# Altium PCB stm.PcbDoc
Units mm, origin at the board's own origin, x right, y up, seen from the top; angles counter-clockwise.
Board outline 39 x 36.5 mm, 4 copper layers (L1 (Signal), L2 (GND), L3 (GND), L4 (Signal)), stack 1.57 mm thick; 35 components, 27 nets, 174 pads, 59 vias.
Unrouted connection lines stored in the file: 8.
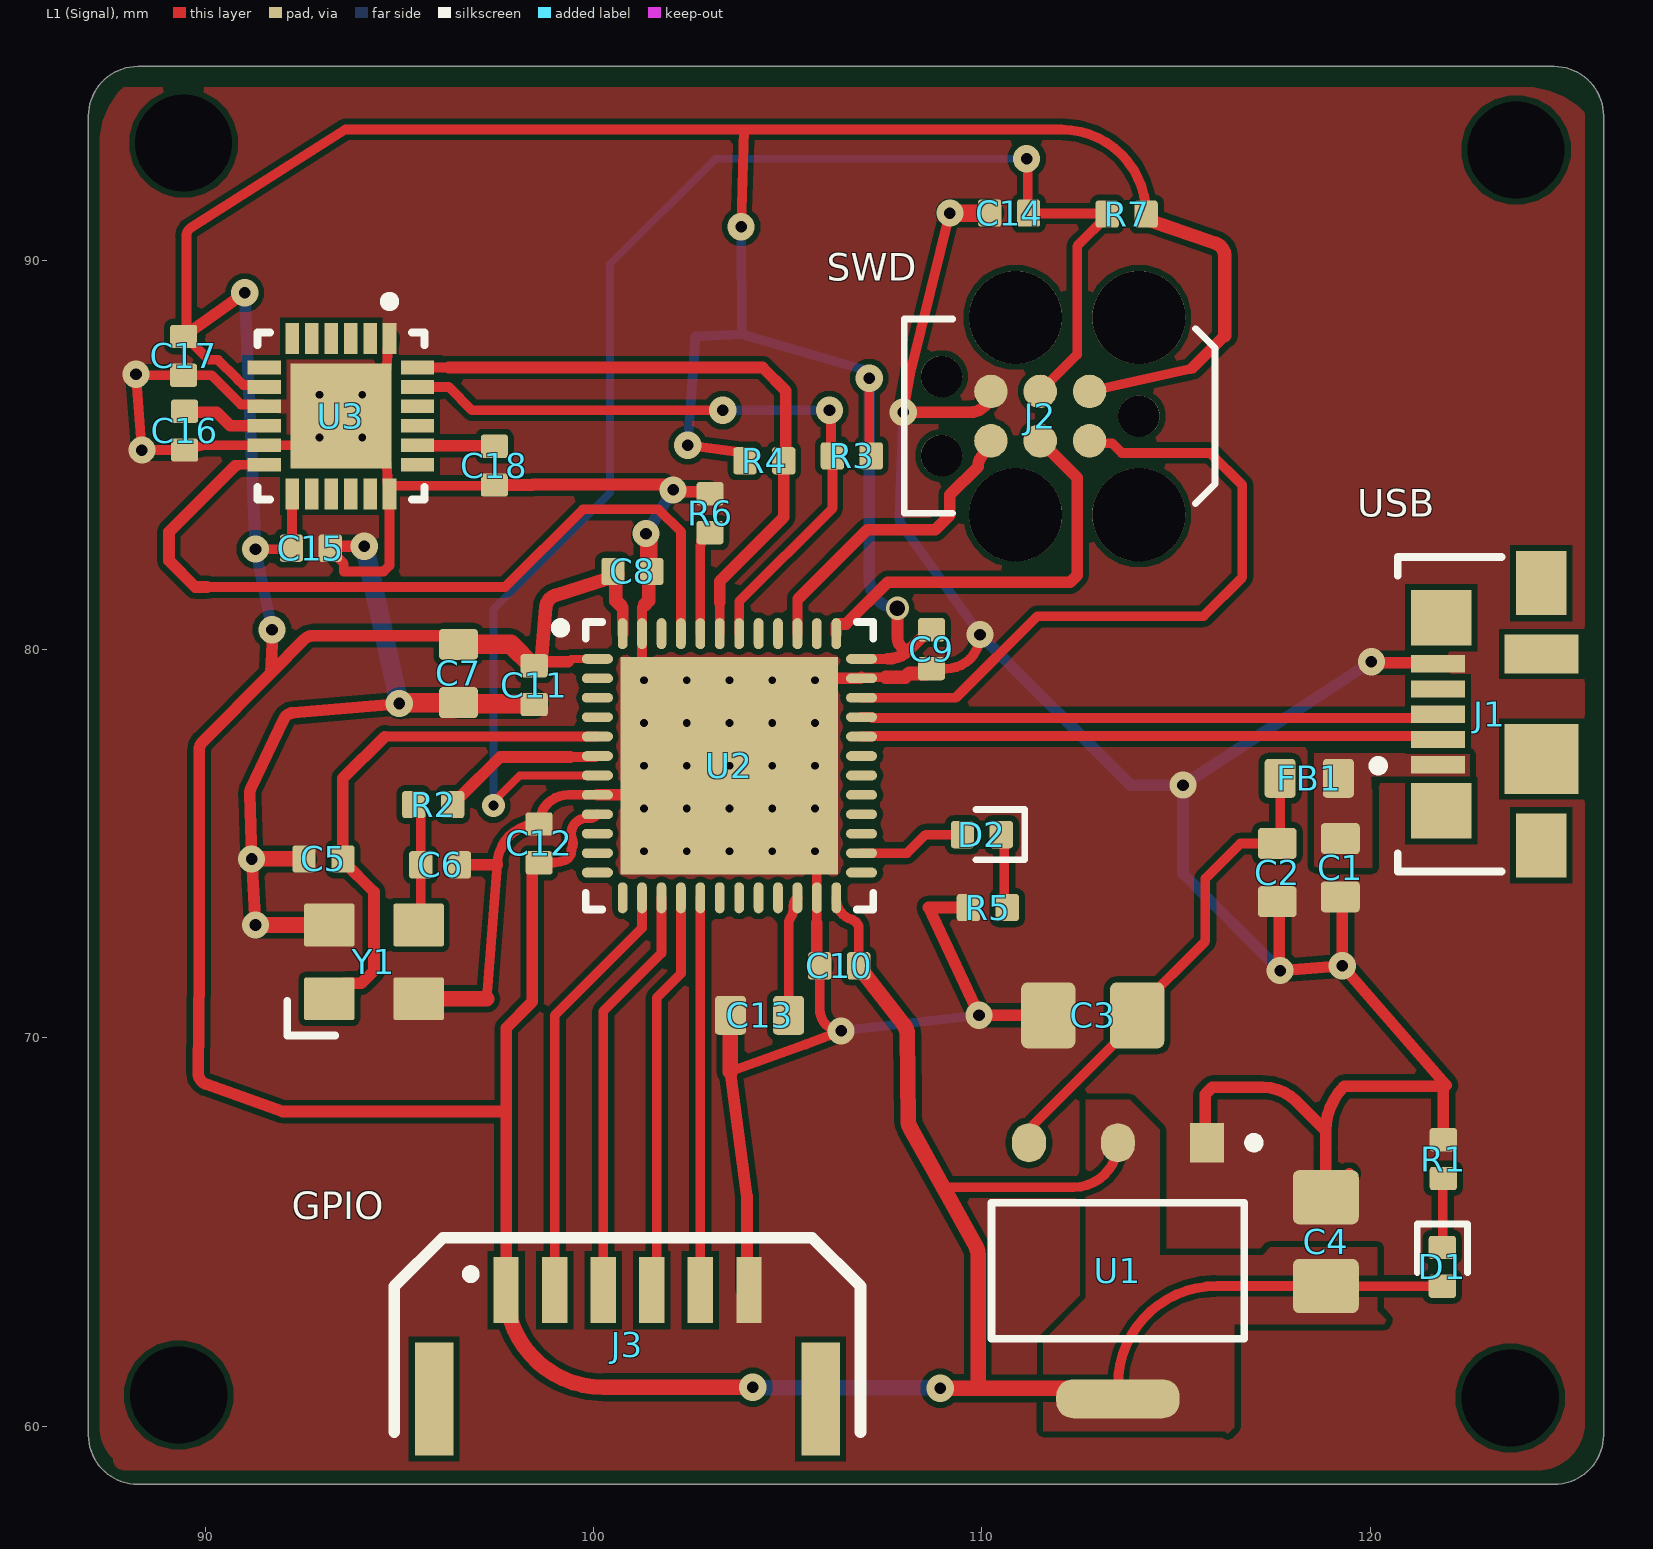
[diagram p0: L1 (Signal) view]
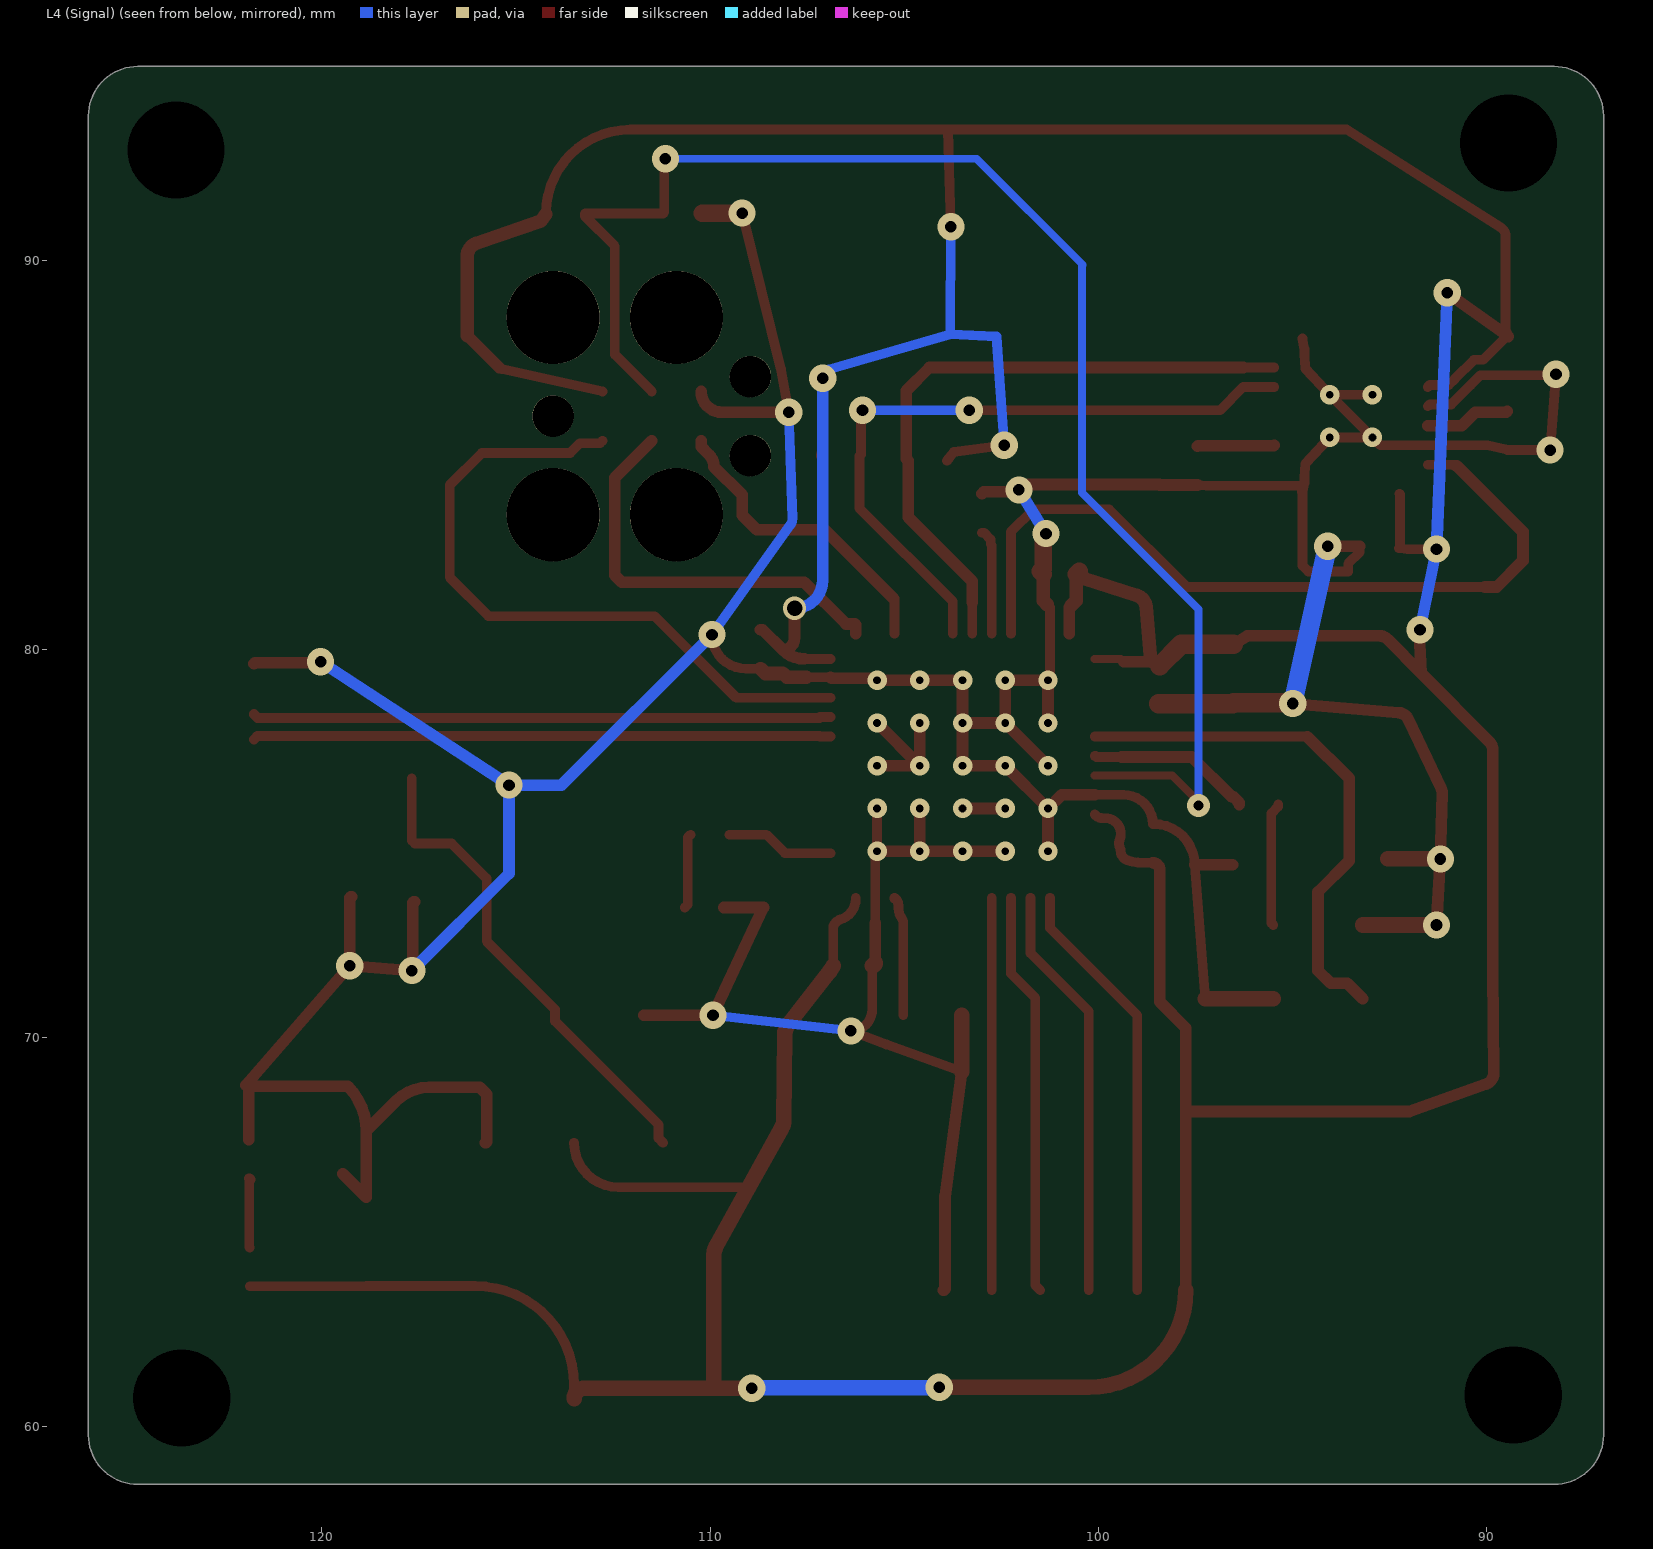
[diagram p1: L4 (Signal) view, seen from below]
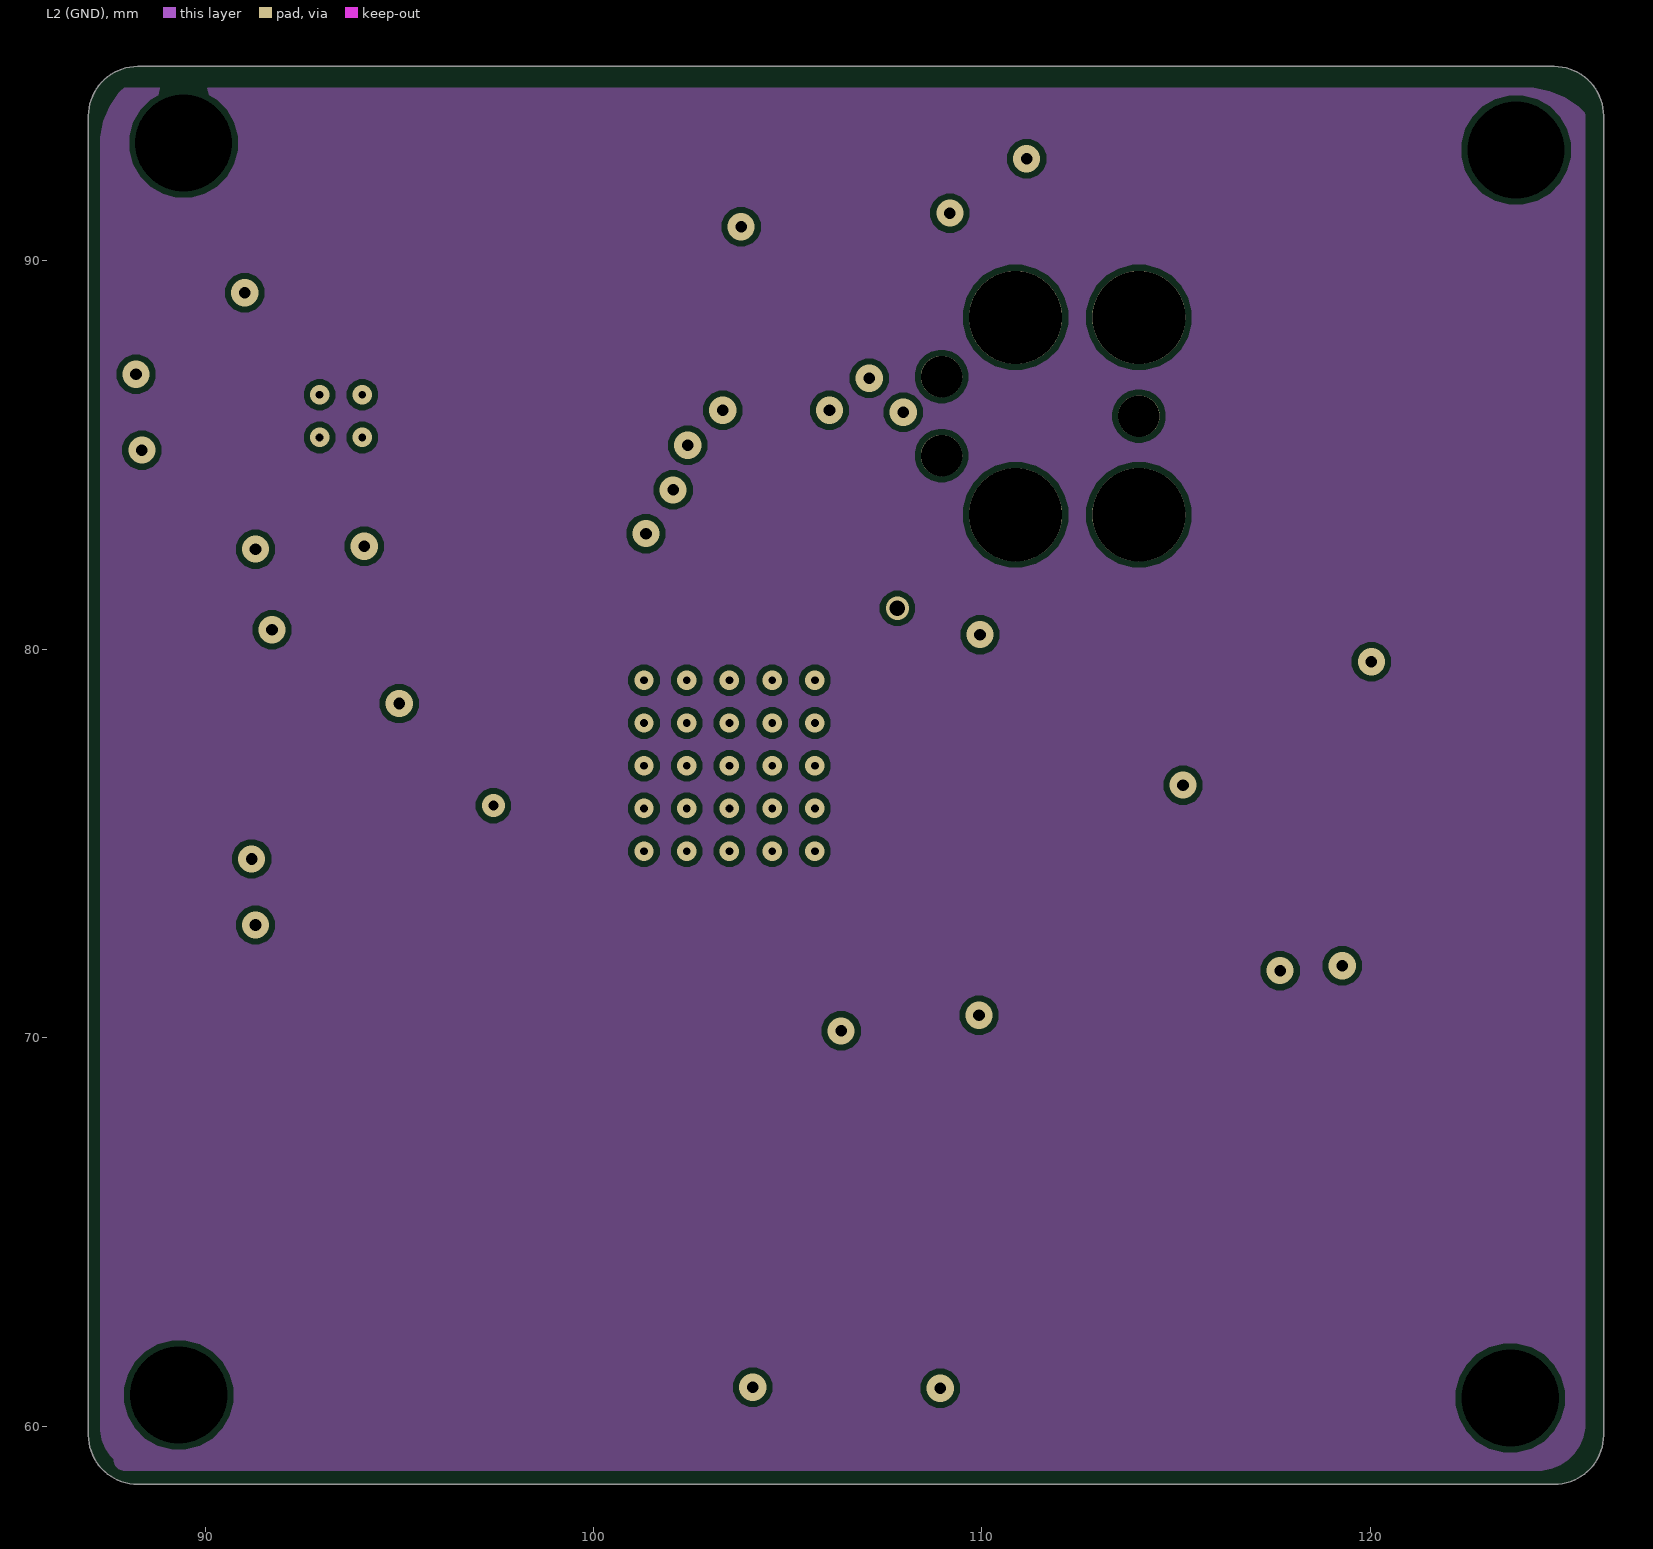
[diagram p2: L2 (GND)]
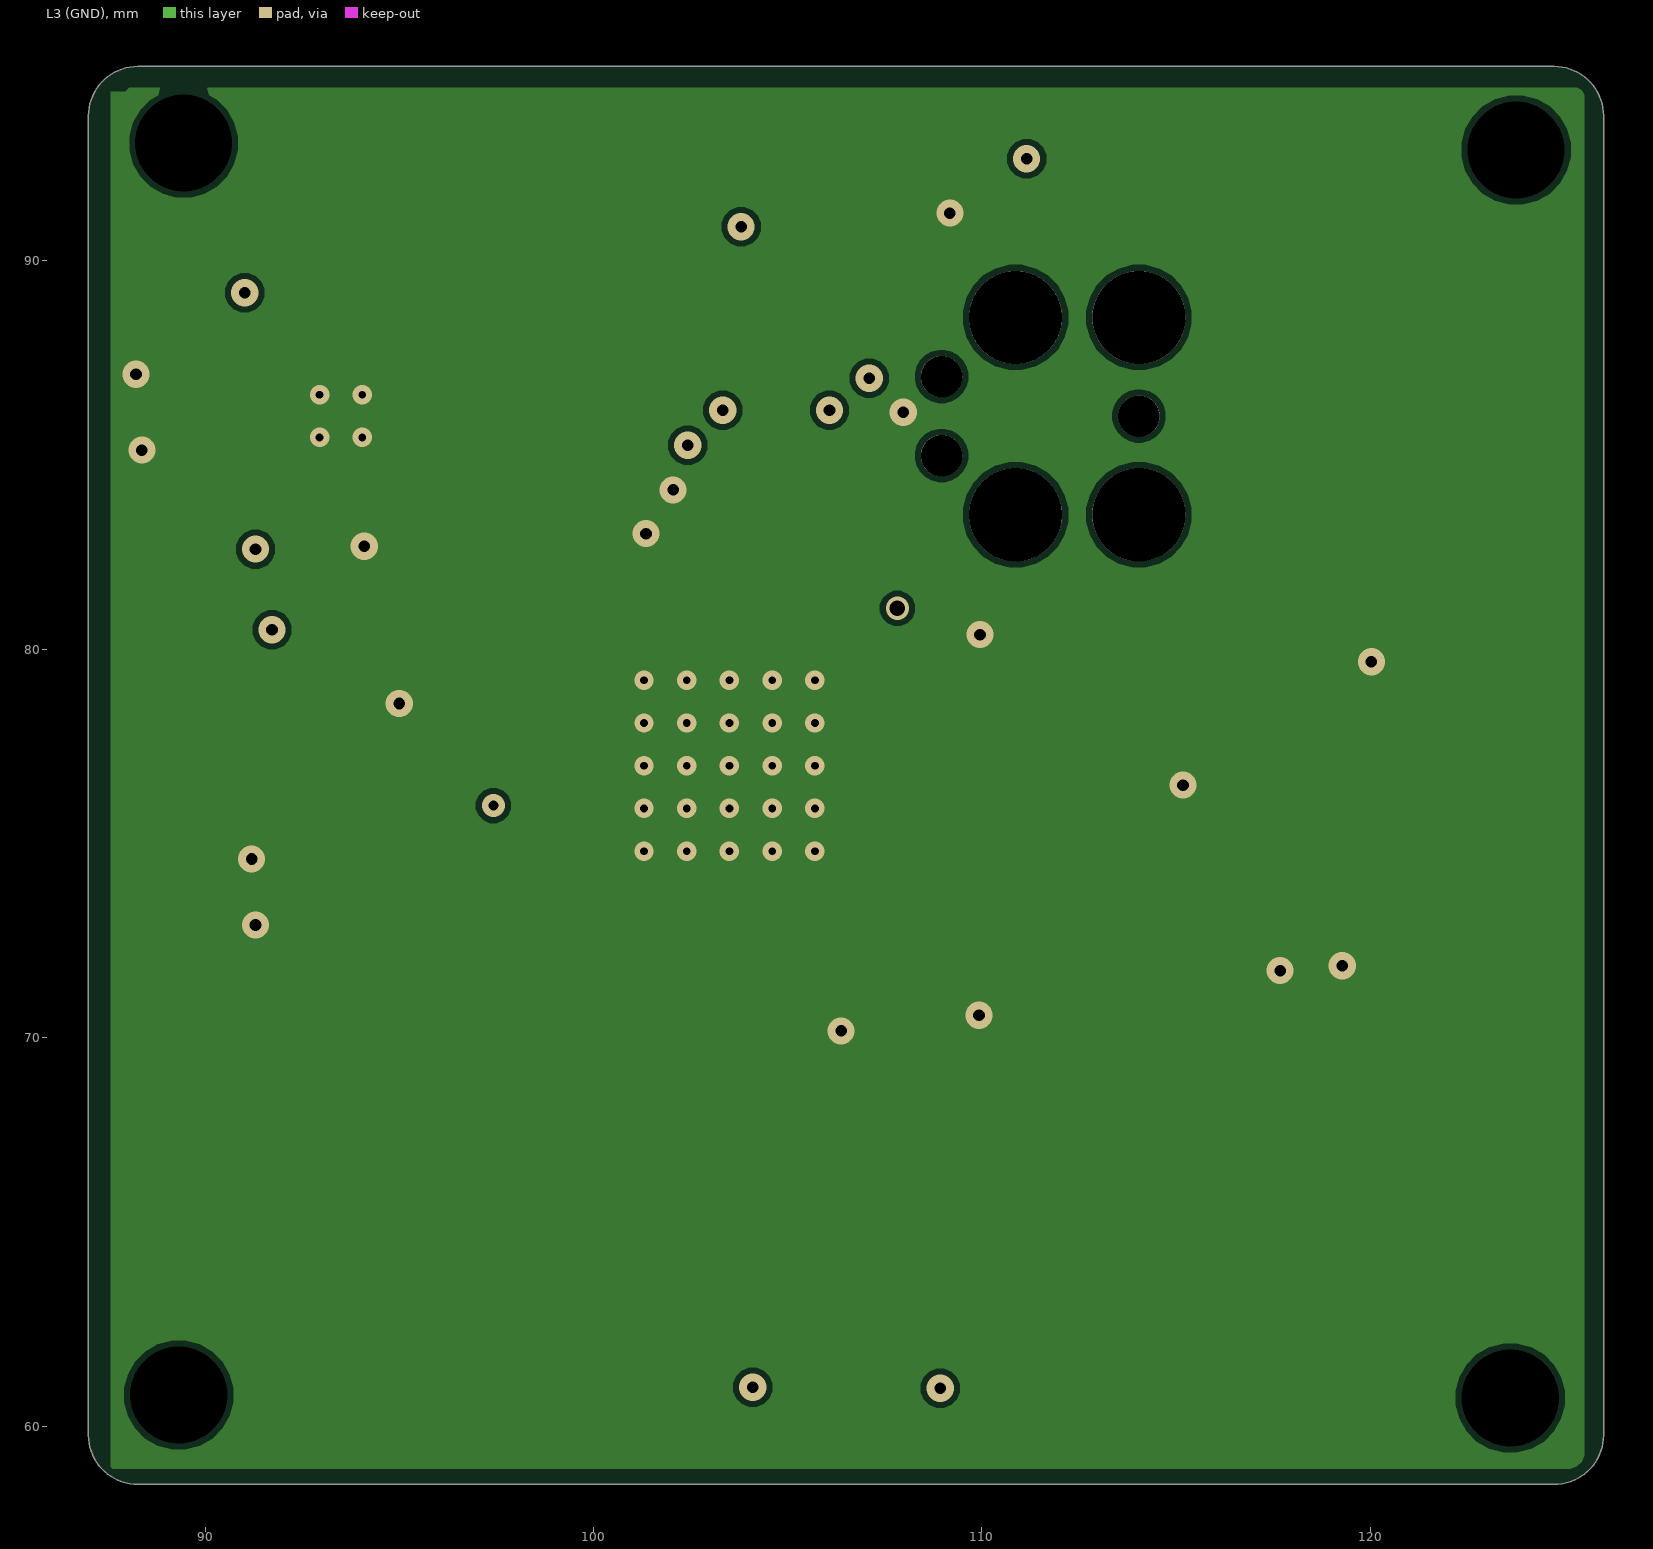
[diagram p3: L3 (GND)]
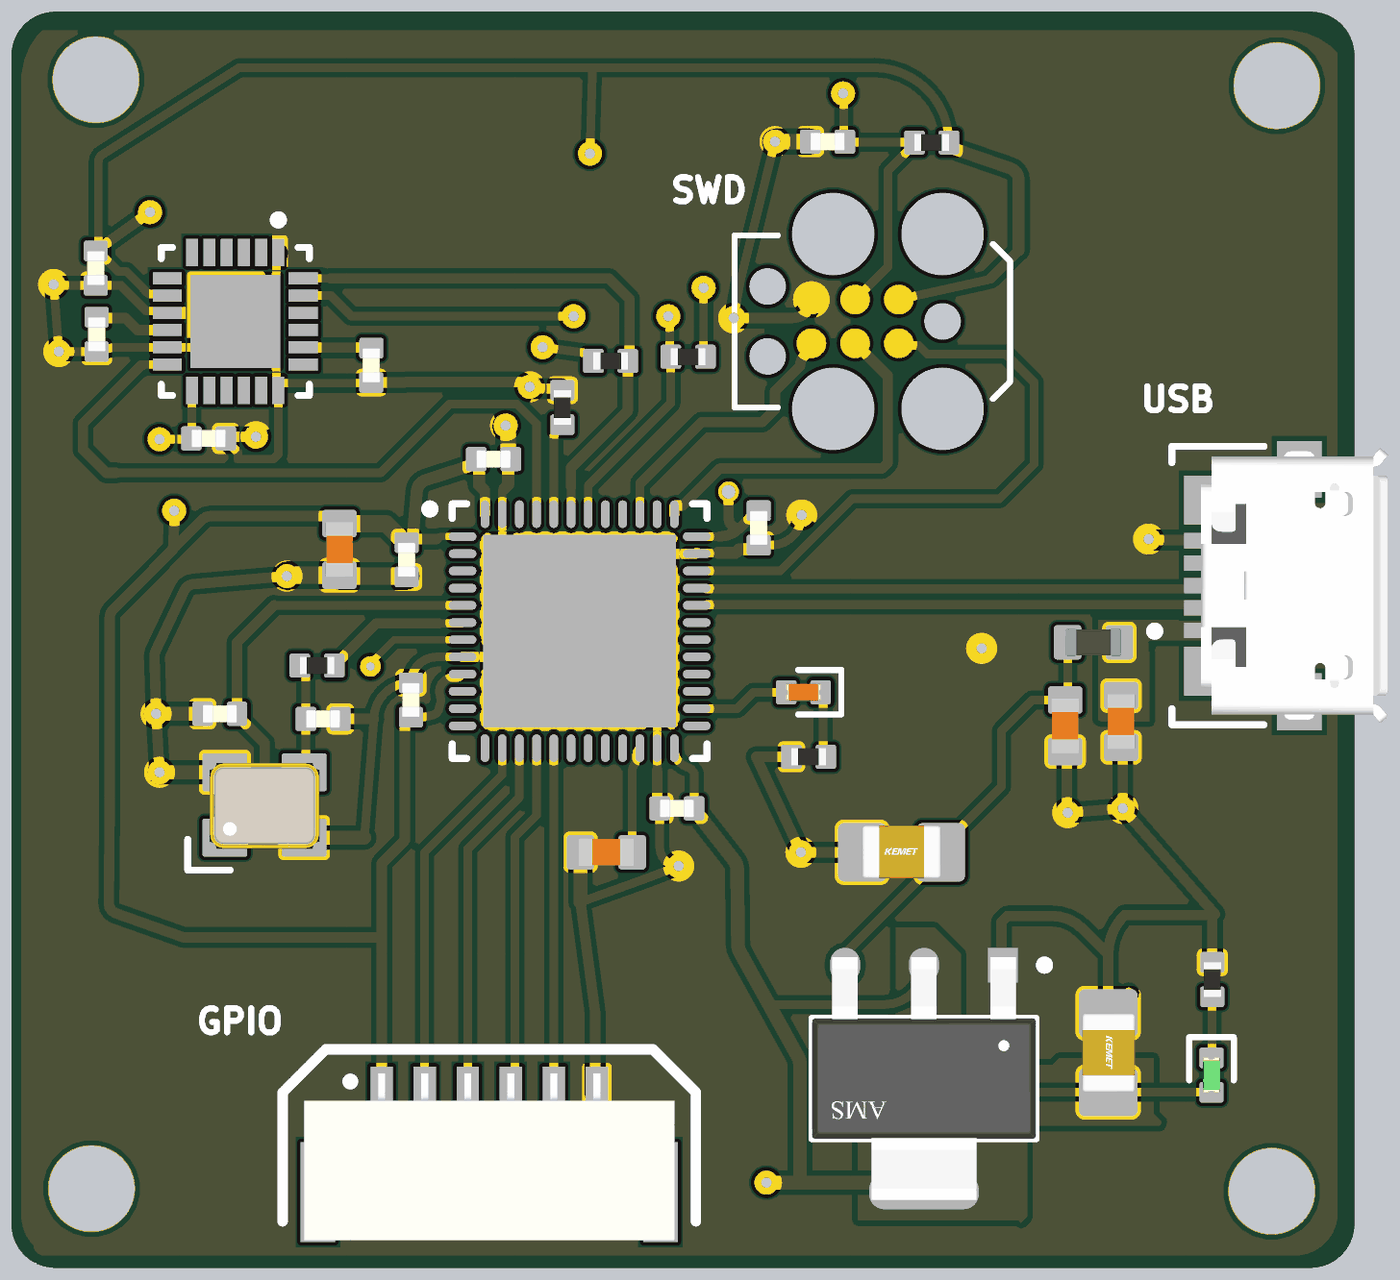
[diagram p4: 3D render of the assembled board from above, using the file's embedded part models]

## Layer stack, top to bottom
Top Solder: solder mask 0.0254, SM-001, Dk 4
L1 (Signal): signal copper 0.035
Dielectric 1: prepreg 0.2, PP-017, Dk 4.6
L2 (GND): signal copper 0.0175
Dielectric 3: core 1.065, Core-039, Dk 4.6
L3 (GND): signal copper 0.0175
Dielectric 5: prepreg 0.2, PP-017, Dk 4.6
L4 (Signal): signal copper 0.035
Bottom Solder: solder mask 0.0254, SM-001, Dk 4

## Board outline
87,59.77 ccw(c88.27,59.77) 88.27,58.5 124.73,58.5 ccw(c124.73,59.77) 126,59.77 126,93.73 ccw(c124.73,93.73) 124.73,95 88.27,95 ccw(c88.27,93.73) 87,93.73

## Design rules (kind name [scope] priority, off if disabled: settings)
Clearance [All] p1: gap=0.15 ignorepadtopadclearanceinfootprint=FALSE
DiffPairsRouting [All] p1: maxlimit=0.254 minlimit=0.202 mostfreqgap=0.254 toplayer_maxgap=0.202 toplayer_prefgap=0.202 toplayer_minwidth=0.26 toplayer_maxwidth=0.26 toplayer_prefwidth=0.26 bottomlayer_maxgap=0.202 bottomlayer_prefgap=0.202 bottomlayer_minwidth=0.26 bottomlayer_maxwidth=0.26 bottomlayer_prefwidth=0.26 impedanceprofiledriven=TRUE impedanceprofileid={22798D74-1703-4F87-8807-00E976444BA2} impedanceprofilevalue=90.000000 maxuncoupledlength=12.7
MinimumSolderMaskSliver [All] p1: minsoldermaskwidth=0.02
PlaneConnect [All] p1: planeconnectstyle=Relief reliefexpansion=0.508 reliefentries=4 reliefconductorwidth=0.15 reliefairgap=0.15
PolygonConnect [All] p1: connectstyle=Direct reliefconductorwidth=0.254 reliefentries=4 polygonreliefangle="90 Angle" airgapwidth=0.254
RoutingVias [All] p1: holewidth=0.3 width=0.7 viastyle="Through Hole" minholewidth=0.2 minwidth=0.35 maxholewidth=0.4 maxwidth=0.9
SilkToSilkClearance [All] p1: silktosilkclearance=0.15
SilkToSolderMaskClearance [IsPad] p1: minsilkscreentomaskgap=0.15 clearancetoexposedcopper=TRUE
SolderMaskExpansion [All] p1: expansion=0.102 istentingtop=FALSE
UnRoutedNet [All] p1: checkbadconnections=TRUE
Width [All] p1: maxlimit=1 minlimit=0.2 preferedwidth=0.3 midlayer1_minwidth=0.254 midlayer1_maxwidth=0.254 midlayer1_prefwidth=0.254 midlayer2_minwidth=0.254 midlayer2_maxwidth=0.254 midlayer2_prefwidth=0.254 minimp=50.000000 maximp=50.000000 favimp=50.000000
24 further rules are at their usual default settings.

## Classes and differential pairs
differential pair class diff_USB: USB_D
differential pair USB_D: +USB_D_P -USB_D_N

## Components (designator, comment, footprint, x,y, rotation, side; value= is the part's Value field where it differs from the comment)
C1 "2u2" CAP_0603 119.225,74.375 r90 top
C2 "2u2" CAP_0603 117.6,74.25 r90 top
C3 "22u" CAP_0805 112.85,70.575 r0 top
C4 "22u" CAP_0805 118.85,64.75 r270 top
C5 "2p" CAP_0402 93.05,74.6 r0 top
C6 "2p" CAP_0402 96.05,74.45 r180 top
C7 "2u2" CAP_0603 96.525,79.375 r90 top
C8 "100n" CAP_0402 101,82 r180 top
C9 "100n" CAP_0402 108.7,80 r90 top
C10 "100n" CAP_0402 106.325,71.85 r0 top
C11 "100n" CAP_0402 98.475,79.075 r90 top
C12 "100n" CAP_0402 98.6,75 r270 top
C13 "2u2" CAP_0603 104.275,70.575 r0 top
C14 "100n" CAP_0402 110.7,91.225 r0 top
C15 "100n" CAP_0402 92.725,82.6 r180 top
C16 "100n" CAP_0402 89.475,85.625 r90 top
C17 "10n" CAP_0402 89.45,87.55 r90 top
C18 "2n2" CAP_0402 97.45,84.725 r90 top
D1 "GREEN" LED_0402_GREEN 121.85,64.1 r90 top
D2 "RED" LED_0402_RED 110,75.225 r0 top
FB1 "FB0603" FB_0603 118.425,76.675 r180 top
J1 "473460001" FP-473460001-MFG 124.05,78.325 r90 top
J2 "TC2030" TC2030-FP 111.5,86 r180 top
J3 "SM06B-GHS-TB" SM06B-GHS-TB 100.875,62.1 r0 top
R1 "1k" RES_0402 121.875,66.875 r90 top
R2 "0R" RES_0402 95.875,76 r180 top
R3 "2k2" RES_0402 106.65,84.975 r0 top
R4 "2k2" RES_0402 104.4,84.85 r180 top
R5 "1k" RES_0402 110.15,73.35 r0 top
R6 "10k" RES_0402 103,83.5 r270 top
R7 "10k" RES_0402 113.725,91.2 r0 top
U1 "AMS1117-3.3" FP-AMS1117-IPC_C 113.5,64 r270 top
U2 "STM32F411CEU6" STM-UFQFPN48_L 103.5,77 r0 top
U3 "MPU-6050" IS-QFN-24_V 93.5,86 r270 top
Y1 "24MHz" XTAL_3225 94.35,71.95 r0 top

## Footprints (in the part's own frame and the unit in brackets; to place one, negate y for a bottom-side part, rotate by r counter-clockwise, add the part's x,y. Pads: shape width x height; smd on the part's side, far side on the other; paste and mask are expansions set on the pad)
CAP_0402 [mm]
  rrect25% 0.6x0.7 smd: 1(-0.5,0) 2(0.5,0)
  body extent -0.5,-0.26 0.5,0.26, height 0.37
CAP_0603 [mm]
  rrect25% 0.8x1 smd: 1(-0.75,0) 2(0.75,0)
  body extent -0.8,-0.4 0.8,0.4, height 0.51
CAP_0805 [mm]
  rrect25% 1.4x1.7 smd: 1(-1.143,0) 2(1.143,0)
  body extent -1.15,-0.76 1.15,0.79, height 1.01
FB_0603 [mm]
  rrect25% 0.8x1 smd: 1(-0.75,0) 2(0.75,0)
  body extent -0.8,-0.4 0.8,0.4, height 0.81
FP-473460001-MFG [mm]
  rect 0.45x1.38 smd paste+0 mask+0: 1(-1.3,2.31) 2(-0.65,2.31) 3(0,2.31) 4(0.65,2.31) 5(1.3,2.31)
  rect 1.425x1.55 smd paste+0 mask+0: 6(-2.488,2.225) 7(2.488,2.225)
  rect 1.65x1.3 smd paste+0 mask+0: 8(-3.375,-0.35) 11(3.375,-0.35)
  rect 1.8x1.9 smd paste+0 mask+0: 9(-1.15,-0.35)
  rect 1x1.9 smd paste+0 mask+0: 10(1.55,-0.35)
  silkscreen extent -4.05,0.67 4.05,3.97, body extent -4.3,-2.48 4.3,3.45, height 0.25
FP-AMS1117-IPC_C [mm]
  rect 1.004x0.872 smd paste+0 mask+0: 1(-3.295,2.29)
  rrect100% 1.004x0.872 smd paste+0 mask+0: 2(-3.295,0) 3(-3.295,-2.29)
  rrect87% 1.004x3.182 smd paste+0 mask+0: 4(3.295,0)
  silkscreen extent -3.42,-3.25 1.75,3.63, body extent -3.9,-3.35 3.9,3.35, height 0.25
IS-QFN-24_V [mm] "QFN, 24-Leads, Body 4x4mm, Pitch 0.5mm, Thermal Pad 2.7x2.6mm"
  rect 0.8x0.35 smd: 1(-2,1.25) 2(-2,0.75) 3(-2,0.25) 4(-2,-0.25) 5(-2,-0.75) 6(-2,-1.25) 13(2,-1.25) 14(2,-0.75) 15(2,-0.25) 16(2,0.25) 17(2,0.75) 18(2,1.25)
  rect 0.35x0.85 smd mask+0.102: 7(-1.25,-1.975) 8(-0.75,-1.975) 9(-0.25,-1.975) 10(0.25,-1.975) 11(0.75,-1.975) 12(1.25,-1.975) 19(1.25,1.975) 20(0.75,1.975) 21(0.25,1.975) 22(-0.25,1.975) 23(-0.75,1.975) 24(-1.25,1.975)
  rect 2.7x2.6 smd: 25(0,0)
  silkscreen extent -3.07,-2.15 2.15,2.15, body extent -2,-2 2,2, height 0.95
LED_0402_GREEN [mm]
  rrect25% 0.6x0.7 smd: A(-0.5,0) K(0.5,0)
  silkscreen extent -0.15,-0.65 1.1,0.65, body extent -0.51,-0.25 0.51,0.25, height 0.45
LED_0402_RED [mm]
  rrect25% 0.6x0.7 smd: A(-0.5,0) K(0.5,0)
  silkscreen extent -0.15,-0.65 1.1,0.65, body extent -0.51,-0.25 0.51,0.25, height 0.45
RES_0402 [mm]
  rrect25% 0.6x0.7 smd: 1(-0.5,0) 2(0.5,0)
  body extent -0.5,-0.25 0.5,0.25, height 0.3
SM06B-GHS-TB [mm]
  rect 0.65x1.7 smd: 1(-3.125,1.4) 2(-1.875,1.4) 3(-0.625,1.4) 4(0.625,1.4) 5(1.875,1.4) 6(3.125,1.4)
  rect 1x2.9 smd: ""(-4.975,-1.4) ""(4.975,-1.4)
  silkscreen extent -6,-2.25 6,2.75, body extent -5.38,-2.8 5.38,2.05, height 4.26
STM-UFQFPN48_L [mm] "QFN, 48-Leads, Body 7.1x7.1mm, Pitch 0.5mm, Thermal Pad 5.6x5.6mm, IPC High Density"
  oval 0.8x0.25 smd: 1(-3.4,2.75) 2(-3.4,2.25) 3(-3.4,1.75) 4(-3.4,1.25) 5(-3.4,0.75) 6(-3.4,0.25) 7(-3.4,-0.25) 8(-3.4,-0.75) 9(-3.4,-1.25) 10(-3.4,-1.75) 11(-3.4,-2.25) 12(-3.4,-2.75) 25(3.4,-2.75) 26(3.4,-2.25) 27(3.4,-1.75) 28(3.4,-1.25) 29(3.4,-0.75) 30(3.4,-0.25) 31(3.4,0.25) 32(3.4,0.75) 33(3.4,1.25) 34(3.4,1.75) 35(3.4,2.25) 36(3.4,2.75)
  oval 0.25x0.8 smd: 13(-2.75,-3.4) 14(-2.25,-3.4) 15(-1.75,-3.4) 16(-1.25,-3.4) 17(-0.75,-3.4) 18(-0.25,-3.4) 19(0.25,-3.4) 20(0.75,-3.4) 21(1.25,-3.4) 22(1.75,-3.4) 23(2.25,-3.4) 24(2.75,-3.4) 37(2.75,3.4) 38(2.25,3.4) 39(1.75,3.4) 40(1.25,3.4) 41(0.75,3.4) 42(0.25,3.4) 43(-0.25,3.4) 44(-0.75,3.4) 45(-1.25,3.4) 46(-1.75,3.4) 47(-2.25,3.4) 48(-2.75,3.4)
  rect 5.6x5.6 smd: 49(0,0)
  silkscreen extent -4.47,-3.7 3.7,3.7, body extent -3.55,-3.55 3.55,3.55, height 0.6
TC2030-FP [mm]
  round 0.863 smd paste-0.432: 1(-1.27,-0.635) 2(-1.27,0.635) 3(0,-0.635) 4(0,0.635) 5(1.27,-0.635) 6(1.27,0.635)
  round 2.4 hole 2.4 unplated: MH(-2.54,2.54) MH(-2.54,-2.54) MH(0.635,2.54) MH(0.635,-2.54)
  round 1.067 hole 1.067 unplated: MH(-2.54,0) MH(2.54,-1.016) MH(2.54,1.016)
  silkscreen extent -4.5,-2.5 3.5,2.5
XTAL_3225 [mm]
  rrect10% 1.3x1.1 smd: 1(-1.15,-0.95) 2(1.15,-0.95) 3(1.15,0.95) 4(-1.15,0.95)
  silkscreen extent -2.23,-1.89 -1,-1, body extent -1.6,-1.28 1.6,1.22, height 0.61

## Part data
C1 C2 C7 C13: library part CAP_0603, "Capacitor SMD 0603"
C3 C4: library part CAP_0805, "Capacitor SMD 0805"
C5 C6 C8 C9 C10 C11 C12 C14 C15 C16 C17 C18: library part CAP_0402, "Capacitor SMD 0402"
D1: library part LED_0402_GREEN, "LED 0402 GREEN SMD"
D2: library part LED_0402_RED, "LED 0402 RED SMD"
FB1: library part FB_0603, "Ferrite Bead SMD 0603"
J1: library part CMP-2000-05246-2, "CONN RCPT USB2.0 MICRO B SMD R/A", Current Rating=1.8A, Manufacturer=Molex, Package=0, Temperature="-30°C to +85°C", Temperature Range High=+85°C, Temperature Range Low=-30°C, Voltage Rating=30V, Automotive=No, Category=Conn, ComponentLink2Description=Datasheet, ComponentLink2URL=https://www.molex.com/webdocs/datasheets/pdf/en-us/0473460001_IO_CONNECTORS.pdf, Conn Orientation="Right Angle", Contact Material=Gold,Nickel, Device Class L1=Connectors, Device Class L2="USB Connectors", Device Class L3=unset, Digikey Description="CONN RCPT USB2.0 MICRO B SMD R/A", Footprint Url=https://www.molex.com/pdm_docs/sd/473460001_sd.pdf, Height=2.945mm, Is Female=yes, Lead Free=Yes, Manufacturer Part Number=473460001, Number Of Contacts=5, Octopart=https://octopart.com/47346-0001-molex-7164928, Pitch=0.65mm, RoHS=TRUE, Shielding=true, Usb Standard="USB 2.0"
J2: "Tag-Connect No-Solder SWD Debug Connector DO NOT PLACE", Manufacturer=Tag-Connect, Manufacturer Part Number=TC2030
J3: "Header Connector 6 Position 1.25MM Pitch SMD Horizontal JST GH", Manufacturer=JST, Manufacturer Part Number=SM06B-GHS-TB
R1 R2 R3 R4 R5 R6 R7: library part RES_0402, "Resistor SMD 0402"
U1: library part CMP-209535-000001-1, "LDO Voltage Regulators 1A, 3.3V", Dropout Voltage=1.1V, Manufacturer="Advanced Monolithic Systems", Max Junction Temp=+125°C, Max Power Dissipation=1.2W, Max Supply Voltage=15V, Nominal Supply Current=5mA, Output Current=1A, Output Voltage=3.3V, Package=AMS1117, Temperature="-40°C to +125°C", Temperature Range Low=-40°C, Automotive=No, Category=IC, ComponentLink2Description=Datasheet, ComponentLink2URL=http://www.advanced-monolithic.com/pdf/ds1117.pdf, Device Class L1="Integrated Circuits (ICs)", Device Class L2="Power Management ICs", Device Class L3="Voltage Regulators - Linear", Height=1.8mm, Ipc Land Pattern Name=SOT229P700X180-4, Lead Free=Yes, Manufacturer Part Number=AMS1117-3.3, Number Of Outputs=1, Octopart=https://octopart.com/ams1117-3.3-advanced+monolithic+systems-25899300, Output Type=Fixed, RoHS=TRUE, Standoff Height=0.64mm, Temperature Range High=+125°C
U2: library part CMP-0243-00165-1, "ARM Cortex-M4 32-bit MCU+FPU, 512 KB Flash, 128 KB RAM, 36 I/Os, 48-Pin UFQFPN, -40 to 85 degC, Tray", I/Os (High Current)=36, Operating Frequency(F) (Processor speed) (MHz)=100, Package Description=UFQFPN48, Package Reference="48-Pin Ultra Thin Fine Pitch Quad Flat No-Lead, 7 x 7 x 0.6 mm Body, 0.5 mm Pitch, Exposed Pad", Supply Voltage(Vcc) min (V)=1.7, ComponentLink1Description="Manufacturer URL", ComponentLink1URL=http://www.st.com/, ComponentLink2Description=Datasheet, ComponentLink2URL=http://www.st.com/st-web-ui/static/active/en/resource/technical/document/datasheet/DM00115249.pdf, Core="ARM Cortex-M4", DatasheetVersion="Rev. 6", FLASH Size (Prog) (kB)=512, Internal RAM Size (kB)=128, Mounting Technology="Surface Mount", Packing=Tray
U3: library part CMP-1753-00002-2, "3-Axis Gyroscope, Accelerometer and a Digital Motion Processor(TM) (DMP), 2.375 to 3.46 V, -40 to 85 degC, 24-Pin QFN, RoHS, Tape and Reel", Manufacturer=InvenSense, Standard Package=5,000, Category=Sensors,Transducers, Datasheet URL=http://datasheet.octopart.com/MPU-6050-InvenSense-datasheet-14421344.pdf, Datasheet Version="Rev. 3.3, 05/2012", Dynamic Catalog=MPU-6000™Series, Family=Multifunction, Featured Product=MPU-60506-Axis,IntegratedI²CSolution, Manufacturer URL=http://www.invensense.com/, Online Catalog=MPU-6000™Series, Other Names="1428-1007-2 / MPU6050", Output Type=Digital, Sensor Type=MotionTracking, Unit PriceUSD=Digital
Y1: library part TSX-3225_24.0000MF15X-AC, "Crystal SMD 24MHz 10PPM 7pF 3225", Manufacturer=Epson, Manufacturer Part Number="TSX-3225 24.0000MF15X-AC"

## Free pads (board coordinates)
  round 1.524 hole 2.5: 2(89.45,93.025) 2(123.75,92.85) 4(123.6,60.725) pg(89.325,60.8)

## Via types
v1: diameter 0.5, hole 0.2, L1 (Signal) to L4 (Signal), 29 vias
v2: diameter 0.7, hole 0.3, L1 (Signal) to L4 (Signal), 28 vias
v3: diameter 0.6, hole 0.4, L1 (Signal) to L4 (Signal), 1 vias
v4: diameter 0.6, hole 0.25, L1 (Signal) to L4 (Signal), 1 vias

## Nets (pads, with @x,y where several pads share a name; then routed paths per layer and width w, separated by ;. In a path a pad name is that pad's centre, name@x,y a point inside that pad or via, vN(x,y) a via of type N, cw(c..) or ccw(c..) an arc to the next point about the centre after c; other vN are vias at no path point)
+3V3: C4.2 C7.2 C8.2 C9.2 C10.2 C11.2 C12.2 C15.2 C17.2 D1.A J2.1 J3.1 R3.2 R4.2 R7.2 U1.2 U1.4 U2.1 U2.9 U2.24 U2.36 U2.48 U3.8 U3.13 | length 174.4
  L1 (Signal) w0.2: 99.35,79.675 99.425,79.75 U2.1
  L1 (Signal) w0.25: v2(91.3,82.575) 92.05,82.575 C15.2 92.275,82.6 92.238,82.637 92.238,83.988 U3.13 ; U3.8 91.475,86.8 90.986,86.8 90.825,86.961 90.825,86.966 90.341,87.45 90.1,87.45 89.5,88.05 C17.2 89.521,88.225 89.521,90.635 cw(c89.771,90.635) 89.637,90.846 93.615,93.375 103.875,93.375 ; C12.2 98.85,74.5 ccw(c98.85,75.75) 99.26,74.569 ccw(c99.177,74.805) 99.426,74.783 cw(c99.825,74.75) 99.456,74.905 ccw(c99.225,75) 99.456,75.095 cw(c99.825,75.25) 99.825,75.65 99.9,75.65 ccw(c99.9,75.9) 100.096,75.745 100.096,75.75 U2.9 ; v2(102.425,85.25) 103.725,85.075 R4.2 ; v2(103.8,90.875) 103.875,93.375 ; U2.24 106.25,73.569 ccw(c106.8,73.569) 106.646,73.041 cw(c106.575,72.801) 106.787,72.933 106.825,72.872 C10.2 ; U2.36 107.575,79.75 ; v2(107.1,86.975) 107.1,85.2 R3.2 ; 108.999,66.151 112.356,66.151 ccw(c112.356,67.295) U1.2 ; J2.1 115.325,87.203 ccw(c115.271,87.447) 115.425,87.25 ; U1.4 113.5,61.067 cw(c116.04,61.067) 116.04,63.607 C4.2 118.857,63.6 D1.A ; R7.2 ccw(c112.05,91.2) 112.05,93.375 103.875,93.375
  L1 (Signal) w0.3: C17.2 89.65,88.2 v2(91.025,89.175) ; 90.025,68.804 cw(c90.127,69.086) 89.827,69.089 89.85,71.7 89.85,77.402 cw(c90.15,77.402) 89.937,77.613 91.692,79.384 ; 90.026,68.803 92,68.1 97.75,68.1 ; v2(91.725,80.5) 91.725,80.499 cw(c91.44,80.405) v2@91.74,80.392 ; v2@91.74,80.391 91.692,79.384 ; C7.2 96.175,80.343 92.767,80.343 ccw(c92.768,80.043) 92.555,80.254 91.692,79.384 ; J3.1 97.75,68.1 ; C12.2 ccw(c98.6,74.325) 98.425,74.325 98.425,70.925 97.75,70.25 97.75,68.1 ; C11.2@98.605,79.675 99.35,79.675 ; 100.7,81.125 100.75,81.075 U2.48 ; 107.575,79.75 ccw(c107.575,80.535) 108.131,79.981 ; v3(107.825,81.05) 107.825,80.287 ccw(c108.131,80.287) 108.131,79.981 ; C9.2 108.65,80.5 108.131,79.981 ; 115.425,87.25 116.25,88.075
  L1 (Signal) w0.35: C11.2@98.425,79.575 98.463,79.596 98.538,79.638 98.605,79.675 98.65,79.7 98.773,81.084 cw(c99.122,81.053) 99.014,81.386 100.375,81.825 C8.2 ; C8.2@100.575,81.925 100.575,81.25 100.7,81.125 ; R7.2 114.35,91.025 116.015,90.448 cw(c115.9,90.117) 116.25,90.117 116.25,88.075
  L1 (Signal) w0.4: J3.1 ccw(c100.25,63.5) 100.25,61 v2(104.1,61) ; C10.2 106.925,71.7 107.992,70.333 cw(c107.676,70.087) 108.076,70.092 ; 108.076,70.091 108.099,67.875 ccw(c108.499,67.88) 108.149,67.687 ; 108.149,67.686 108.999,66.151 109.85,64.615 cw(c109.5,64.422) 109.9,64.422 109.9,60.975 ; v2(108.925,60.975) 109.9,60.975 ; U1.4 ccw(c113.23,60.705) 113.23,60.975 109.9,60.975
  L1 (Signal) w0.45: C8.2 C8.2@100.575,81.925
  L1 (Signal) w0.5: C7.2 97.875,80.125 C11.2@98.425,79.575
  L4 (Signal) w0.25: v2(102.425,85.25) 102.625,88.05 103.814,88.108 ; v2(103.8,90.875) 103.814,88.108 ; v2(107.1,86.975) 107.031,87.1 107.014,87.131 106.944,87.201 103.814,88.108
  L4 (Signal) w0.3: v2(91.025,89.175) v2(91.3,82.575) v2(91.725,80.5) ; v2(107.1,86.975) 107.1,81.775 ccw(c107.825,81.775) v3(107.825,81.05)
  L4 (Signal) w0.4: v2(104.1,61) 104.112,60.988 108.912,60.988 v2(108.925,60.975)
+5V: C2.2 C3.2 FB1.2 U1.3 | length 12.6
  L1 (Signal) w0.25: U1.3 111.329,67.414 111.329,67.761 113.993,70.425 C3.2 113.993,70.725 115.75,72.482 115.75,74.1 116.65,75 C2.2 117.675,75.075 FB1.2
GND: C1.1 C2.1 C3.1 C4.1 C5.1 C6.1 C7.1 C8.1 C9.1 C10.1 C11.1 C12.1 C13.1 C14.1 C15.1 C16.1 C17.1 C18.1 J1.5 J2.5 J3.6 R1.2 R5.1 R6.1 U1.1 U2.8 U2.23 U2.35 U2.47 U2.49 U3.1 U3.9 U3.11 U3.18 U3.25 Y1.2 Y1.4 | length 177.5
  L1 (Signal) w0.25: U3.9 91.475,86.3 90.92,86.3 90.425,86.795 90.425,86.8 90.175,87.05 C17.1 88.25,87.05 v2(88.225,87.075) v2(88.375,85.125) C16.1 89.524,85.148 89.985,85.25 U3.11 92.75,85.25 v1(92.95,85.45) ; v1(92.95,86.55) v1(94.05,86.55) ; C15.1@93.275,82.65 93.275,82.5 93.575,82.2 93.575,82 94.6,82 94.75,82.15 U3.18 ; U3.1 94.7,87.725 94.7,87.6 cw(c94.425,87.6) 94.699,87.581 94.675,87.225 v1(94.05,86.55) ; 97.25,71 97.525,74.45 cw(c98.575,74.45) 98.575,75.5 C12.1 cw(c99.35,75.5) 99.35,76.25 U2.8 ; C18.1 97.225,84.206 94.8,84.206 U3.18 ; v1(101.3,79.2) 101.25,79.25 U2.47 101.25,81.075 101.325,81.15 ; 103.525,69.125 105.453,69.822 ccw(c105.325,70.175) 105.459,69.825 v2(106.375,70.175) cw(c106.375,70.725) 105.825,70.725 C10.1 ; v1(105.7,75.9) v1(105.7,74.8) 105.75,74.75 U2.23 105.75,72.95 ; U2.35@106.9,79.275 107.525,79.275 ; v2(107.975,86.1) 108.164,87.158 cw(c108.96,87.016) 108.175,87.211 v2(109.175,91.225) ; C9.1 109.075,79.5 ccw(c109.075,80.375) v2(109.95,80.375) ; v1(92.95,85.45) U3.25 v1(94.05,86.55) ; v1(92.95,85.45) v1(94.05,85.45) 94.675,84.775 94.699,84.419 cw(c94.425,84.4) 94.7,84.4 94.7,84.275 U3.18
  L1 (Signal) w0.3: v2(91.3,72.9) v2(91.2,74.6) 91.152,76.278 cw(c91.452,76.286) 91.181,76.415 92.026,78.195 cw(c92.297,78.066) 92.27,78.365 ; 92.271,78.365 v2(95,78.6) ; C15.1@93.275,82.65 v2(94.1,82.65) ; C7.1 C7.1@96.55,78.6 ; C6.1 97.525,74.45 ; C18.1 98.425,84.225 98.438,84.237 v2@101.804,84.237 ; C11.1@98.45,78.6 C11.1 ; U2.8 100.95,76.25 v1(101.3,75.9) ; v1(101.3,74.8) v1(101.3,75.9) ; v1(101.3,77) v1(102.4,78.1) ; v1(101.3,78.1) v1(101.3,79.2) v1(102.4,79.2) v1(102.4,78.1) ; v2(102.05,84.1) 102.1,84.05 102.95,84.05 R6.1 ; v1(102.4,74.8) v1(103.5,74.8) v1(104.6,74.8) ; v1(102.4,75.9) v1(103.5,75.9) ; 103.525,69.125 103.95,65.925 103.95,63.55 ccw(c104,63.55) J3.6 ; v1(104.6,75.9) v1(104.6,74.8) ; v1(104.6,78.1) v1(104.6,77) ; v1(105.7,74.8) v1(104.6,74.8) ; v1(105.7,77) v1(104.6,77) ; v1(105.7,78.1) v1(104.6,77) ; C10.1@105.75,71.925 105.75,72.95 ; U2.35@106.9,79.275 106.875,79.25 105.75,79.25 v1(105.7,79.2) v1(104.6,79.2) v1(103.5,79.2) v1(103.5,78.1) ; v2(107.975,86.1) 109.695,86.1 ccw(c109.695,86.635) J2.5 ; R5.1 108.625,73.35 v2(109.925,70.575) C3.1 ; U1.1 cw(c115.79,67.335) 115.75,67.335 115.75,68.547 115.838,68.635 115.926,68.723 116.05,68.723 117.225,68.723 cw(c117.225,67.499) 118.09,68.365 118.85,67.605 ; C2.1 cw(c117.6,73.45) 117.65,73.45 117.65,71.75 ccw(c117.675,71.75) v2(117.675,71.725) v2(119.275,71.85) ; 118.85,67.156 C4.1 C4.1@119.45,66.493 ; 118.85,67.197 118.85,67.605 ; C1.1 cw(c119.225,73.575) 119.275,73.575 v2(119.275,71.85) ; v2(120.025,79.675) 120.05,79.65 121.715,79.65 J1.5 ; R1.2 121.875,68.7 cw(c121.95,68.7) 121.896,68.752 ; v1(101.3,75.9) v1(102.4,77) v1(103.5,77) v1(103.5,78.1) ; v1(102.4,78.1) v1(103.5,78.1) ; 118.85,67.605 cw(c120.472,67.605) 119.325,68.752 121.896,68.752 ; v2(119.275,71.85) 121.938,68.789 121.95,68.775 121.896,68.752
  L1 (Signal) w0.35: 101.325,81.15 101.425,81.25 C8.1@101.425,81.925 ; 107.525,79.275 108.025,79.275 108.125,79.375 108.575,79.375 C9.1
  L1 (Signal) w0.4: v2(91.2,74.6) C5.1 ; v2(91.3,72.9) Y1.4 ; Y1.2 97.25,71 ; 103.525,69.125 C13.1 ; C10.1@105.75,71.925 ccw(c105.825,71.925) C10.1
  L1 (Signal) w0.45: v2(101.35,82.975) 101.35,82.907 101.425,82.832 101.425,82.075 C8.1 C8.1@101.425,81.925 ; v2(109.175,91.225) C14.1
  L1 (Signal) w0.5: v2(95,78.6) cw(c95.025,78.6) 95.025,78.625 C7.1 ; C7.1@96.55,78.6 C11.1@98.45,78.6
  L4 (Signal) w0.25: v2(106.375,70.175) v2(109.925,70.575) ; 107.925,83.206 v2(109.95,80.375) ; 107.924,83.206 cw(c108.128,83.351) 107.878,83.36 v2(107.975,86.1)
  L4 (Signal) w0.3: v2(101.35,82.975) v2(102.05,84.1) ; v2(109.95,80.375) 113.825,76.5 v2(115.175,76.5) ; v2(117.675,71.725) 115.175,74.225 v2(115.175,76.5) ; v2(120.025,79.675) v2(115.175,76.5)
  L4 (Signal) w0.5: v2(94.1,82.65) v2(95,78.6)
IMU_CPOUT: C18.2 U3.20 | length 2
  L1 (Signal) w0.3: U3.20 95.488,85.238 97.438,85.238 C18.2
IMU_INT: U2.45 U3.12 | length 21.1
  L1 (Signal) w0.25: 90.05,81.6 97.725,81.6 99.725,83.6 101.675,83.6 102.25,83.025 U2.45 ; 90.8,84.725 90.825,84.75 U3.12
  L1 (Signal) w0.3: 90.05,81.6 89.75,81.6 89.075,82.275 89.075,83.025 90.775,84.725 90.8,84.725
IMU_REGOUT: C16.2 U3.10 | length 2.2
  L1 (Signal) w0.3: C16.2 89.5,86.1 90.3,86.1 90.65,85.75 U3.10
IMU_SCL: R3.1 U2.42 U3.23 | length 17.6
  L1 (Signal) w0.25: U3.23 96.275,86.75 96.875,86.15 v2(103.325,86.15) ; U2.42 103.75,81.225 106.15,83.625 R3.1 106.113,85.012 106.113,86.112 v2(106.075,86.15)
  L4 (Signal) w0.25: v2(103.325,86.15) v2(106.075,86.15)
IMU_SDA: R4.1 U2.43 U3.24 | length 16.7
  L1 (Signal) w0.25: U3.24 96.275,87.25 ; U2.43 103.25,81.2
  L1 (Signal) w0.3: 96.275,87.25 104.35,87.25 104.95,86.65 104.95,84.9 R4.1 104.9,83.4 103.25,81.75 103.25,81.2
LED_PWR_K: D1.K R1.1 | length 1.8
  L1 (Signal) w0.25: D1.K 121.862,64.612 121.862,66.312 121.825,66.35 121.85,66.375 R1.1
MCU_BOOT0: R6.2 U2.44 | length 2.7
  L1 (Signal) w0.25: U2.44 102.75,82.679 102.775,82.704 102.775,82.825 102.95,83 R6.2
MCU_LED_A: D2.A U2.26 | length 2.8
  L1 (Signal) w0.25: U2.26 108.075,74.75 108.55,75.225 D2.A
MCU_LED_K: D2.K R5.2 | length 1.9
  L1 (Signal) w0.25: D2.K 110.575,75.15 110.575,73.425 R5.2
MCU_NRST: C14.2 J2.3 R7.1 U2.7 | length 38.8
  L1 (Signal) w0.2: v4(97.425,75.975) 97.425,76.075 98.1,76.75 U2.7
  L1 (Signal) w0.25: v2(111.15,92.625) 111.175,92.6 111.175,91.25 C14.2 111.213,91.212 113.213,91.212 R7.1 113.225,91.15 112.45,90.375 112.45,87.585 J2.3
  L4 (Signal) w0.2: v4(97.425,75.975) 97.425,81.025 100.425,84.025 100.425,89.875 100.408,89.892 103.141,92.625 v2(111.15,92.625)
MCU_OSC_IN: C5.2 U2.5 Y1.1 | length 13.7
  L1 (Signal) w0.25: 94.625,77.75 U2.5
  L1 (Signal) w0.3: Y1.1 93.6,71.4 94.025,71.4 94.35,71.725 94.35,73.75 93.55,74.55 C5.2 93.55,76.675 94.625,77.75
MCU_OSC_OUT: R2.1 U2.6 | length 4.3
  L1 (Signal) w0.25: 99.4,77.225 100.05,77.225 100.075,77.25 U2.6
  L1 (Signal) w0.3: R2.1 96.375,76.05 96.525,76.2 96.575,76.2 97.6,77.225 99.4,77.225
MCU_PA4: J3.2 U2.14 | length 11
  L1 (Signal) w0.25: J3.2 99,70.575 101.25,72.825 U2.14
MCU_PA5: J3.3 U2.15 | length 10.7
  L1 (Signal) w0.25: J3.3 100.25,70.675 101.75,72.175 U2.15
MCU_PA6: J3.4 U2.16 | length 10.4
  L1 (Signal) w0.25: J3.4 101.625,63.625 101.625,71.025 102.25,71.65 U2.16
MCU_PA7: J3.5 U2.17 | length 10.1
  L1 (Signal) w0.25: J3.5 U2.17
MCU_SWDCLK: J2.4 U2.37 | length 10.8
  L1 (Signal) w0.3: U2.37 106.25,80.625 106.275,80.65 106.5,80.65 107.575,81.725 112.274,81.725 112.45,81.901 112.45,84.415 J2.4
MCU_SWDIO: J2.2 U2.34 | length 17.9
  L1 (Signal) w0.25: U2.34 109.325,78.75 111.425,80.85 115.7,80.85 116.7,81.85 116.7,84.225 115.875,85.05 113.6,85.05 113.348,85.302 112.833,85.302 J2.2
MCU_SWO: J2.6 U2.39 | length 8
  L1 (Signal) w0.25: U2.39 105.25,81.275 105.275,81.3
  L1 (Signal) w0.3: 105.275,81.3 107.05,83.075 108.8,83.075 109.175,83.45 109.175,83.975 109.9,84.7 cw(c110.341,84.7) 110.029,85.012 110.23,85.213 J2.6
MCU_VCAP1: C13.2 U2.22 | length 3.1
  L1 (Signal) w0.25: C13.2 105.025,72.943 cw(c105.275,72.942) 105.073,73.089 ccw(c104.75,73.325) 105.15,73.325 105.15,73.4 cw(c105.4,73.4) 105.223,73.577 105.25,73.577 U2.22
USB_D_N: J1.2 U2.32 | length 14.9
  L1 (Signal) w0.26: U2.32 107.165,77.75 107.184,77.769 114.36,77.769 121.646,77.769 J1.2
USB_D_P: J1.3 U2.33 | length 14.9
  L1 (Signal) w0.26: U2.33 107.165,78.25 107.184,78.231 114.551,78.231 121.646,78.231 J1.3
VBUS: C1.2 FB1.1 J1.1
XTAL_IN: C6.2 R2.2 Y1.3 | length 3.2
  L1 (Signal) w0.25: R2.2 95.375,75.95 95.55,75.775 C6.2 95.55,72.95 Y1.3
pads on no net: J1.4 J1.6 J1.7 J1.8 J1.9 J1.10 J1.11 J2.MH J3. U2.2 U2.3 U2.4 U2.10 U2.11 U2.12 U2.13 U2.18 U2.19 U2.20 U2.21 U2.25 U2.27 U2.28 U2.29 U2.30 U2.31 U2.38 U2.40 U2.41 U2.46 U3.2 U3.3 U3.4 U3.5 U3.6 U3.7 U3.14 U3.15 U3.16 U3.17 U3.19 U3.21 U3.22

## Polygon pours and split planes (outlines as drawn)
GND on L1 (Signal) "GND_pour" (solid, pour order 27): 87.912,94.462 123.978,94.462 cw(c123.978,92.328) 125.487,93.837 cw(c125.427,93.777) 125.512,93.777 125.512,60.087 cw(c124.287,60.087) 124.287,58.862 87.937,58.862 cw(c87.937,59.162) 87.637,59.162 cw(c88.482,60.007) 87.287,60.007 87.287,92.978 cw(c89.421,92.978) 87.912,94.487
+3V3 on L1 (Signal) "+3V3_L01_P009" (solid, pour order 9): 111.575,59.875 116.25,59.875 116.325,59.8 116.5,59.975 116.5,62.625 120.525,62.625 120.175,62.975 120.175,64.6 117.425,64.6 117.225,64.4 114.575,64.4 114.575,67.625 113.8,68.4 112.675,68.4 112.675,63.3 111.575,62.2 111.575,60.225
VBUS on L1 (Signal) "VBUS_L01_P000" (solid, pour order 0): 118.55,77.325 118.55,74.275 118.65,74.375 120.05,74.375 120.05,76.4 120.025,76.425 120.025,76.65 120,76.675 120.05,76.725 122.55,76.725 122.55,77.3 122.525,77.325 122.55,77.3 122.525,77.325
no net on L2 (GND) "GND_pour" (solid, pour order 23): 87.925,94.45 123.991,94.45 cw(c123.991,92.316) 125.5,93.825 cw(c125.44,93.765) 125.525,93.765 125.525,60.075 cw(c124.3,60.075) 124.3,58.85 87.95,58.85 cw(c87.95,59.15) 87.65,59.15 cw(c88.495,59.995) 87.3,59.995 87.3,92.966 cw(c89.434,92.966) 87.925,94.475
GND on L3 (GND) "GND_pour" (solid, pour order 26): 87.8,94.475 ccw(c87.86,94.535) 87.86,94.45 125.275,94.45 cw(c125.275,94.225) 125.5,94.225 125.5,59.325 cw(c125.075,59.325) 125.075,58.9 87.625,58.9 87.575,58.95 87.575,94.35 87.95,94.35 88.05,94.45

## Silkscreen, mask and mechanical layers (free items; w line width, h text height)
Top Overlay:
  text "SWD" at 106.004,89.479 h0.7
  text "USB" at 119.654,83.404 h0.7
  text "GPIO" at 92.229,65.329 h0.7
Mechanical 1:
  lines w0.254: 87,59.77 ccw(c88.27,59.77) 88.27,58.5 124.73,58.5 ccw(c124.73,59.77) 126,59.77 126,93.73 ccw(c124.73,93.73) 124.73,95 119,95 88.27,95 ccw(c88.27,93.73) 87,93.73 87,59.77

## Text inside footprints (layer, text, board x,y; h text height)
D1: Mechanical 13 "+" at 121.342,62.217 h0.5 r90
D2: Mechanical 13 "+" at 108.117,75.733 h0.5